# Altium PCB PCB1.PcbDoc
Units mm, origin at the board's own origin, x right, y up, seen from the top; angles counter-clockwise.
Board outline 70 x 50 mm, 2 copper layers (Top Layer, Bottom Layer); 23 components, 24 nets, 110 pads, 3 vias.
Unrouted connection lines stored in the file: 1.
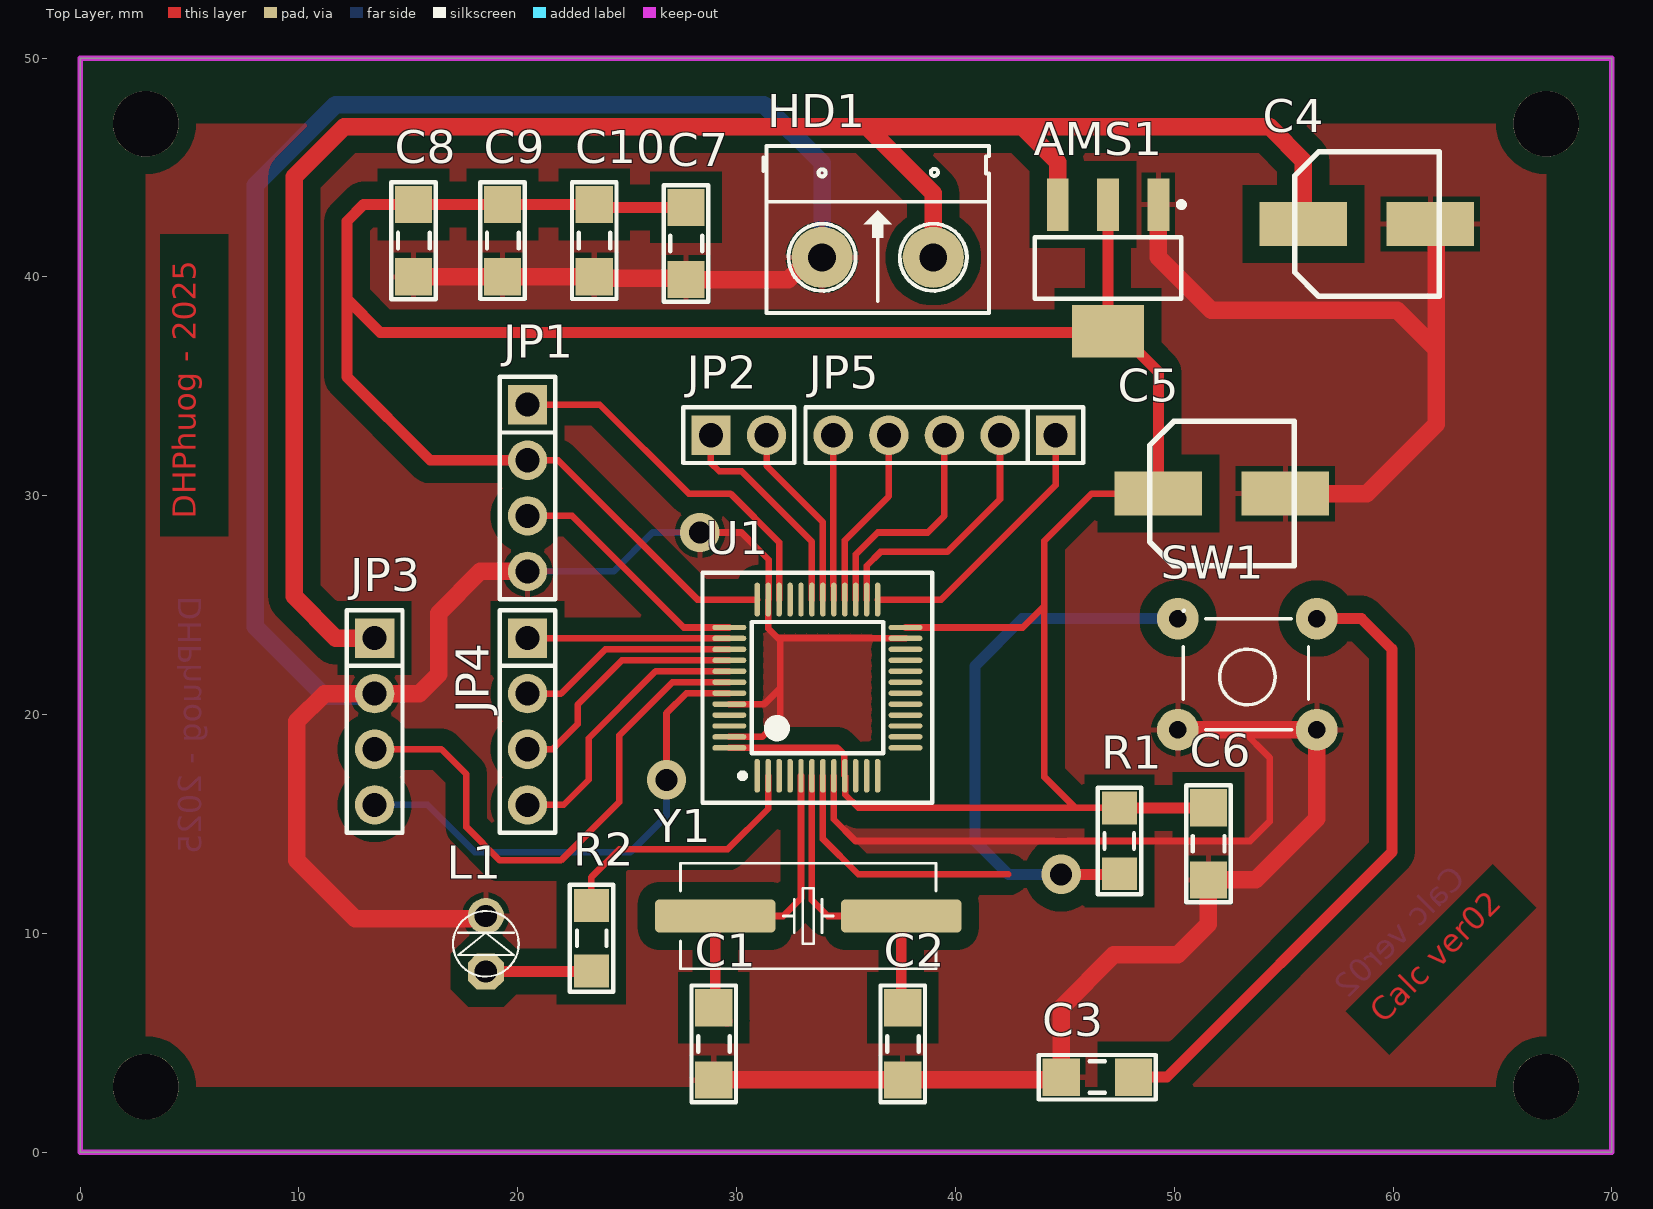
[diagram p0: Top Layer view]
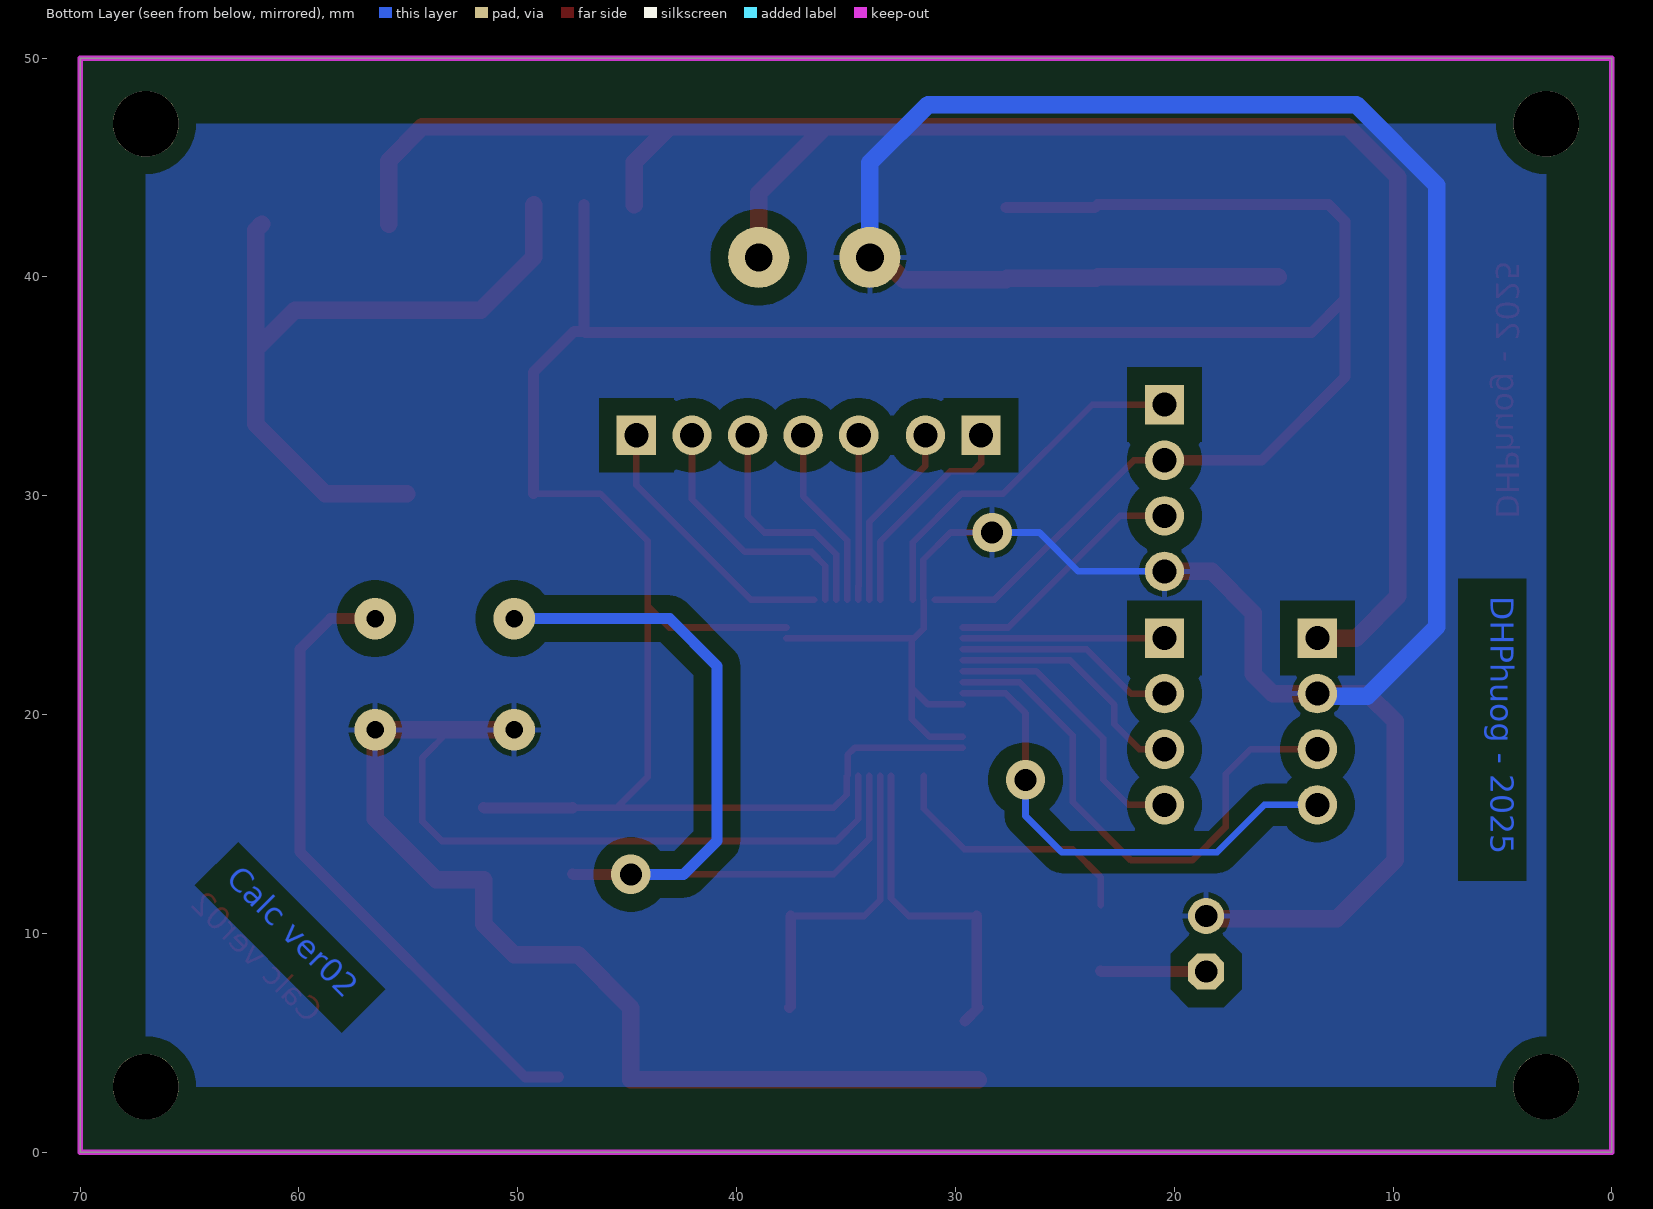
[diagram p1: Bottom Layer view, seen from below]
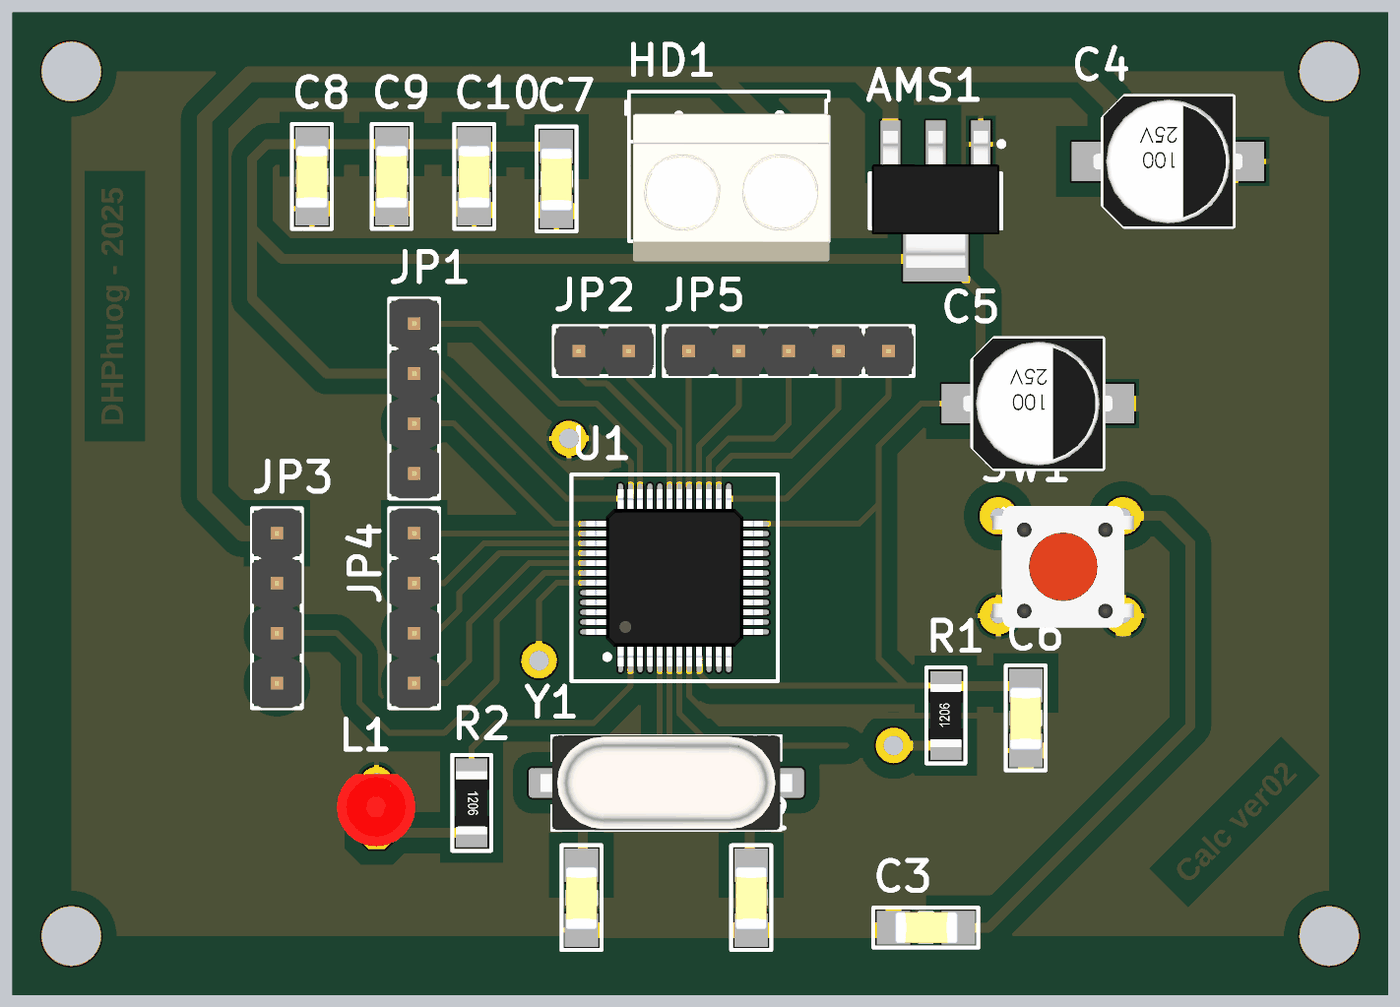
[diagram p2: 3D render of the assembled board from above, using the file's embedded part models]

## Layer stack, top to bottom
Top Solder: solder mask 0.0102, Solder Resist, Dk 3.5
Top Layer: signal copper 0.0356
Dielectric 1: dielectric 0.32, FR-4, Dk 4.8
Bottom Layer: signal copper 0.0356
Bottom Solder: solder mask 0.0102, Solder Resist, Dk 3.5

## Board outline
0,0 70,0 70,50 0,50

## Design rules (kind name [scope] priority, off if disabled: settings)
Clearance [All] p1: gap=0.8 ignorepadtopadclearanceinfootprint=FALSE
PolygonConnect [All] p1: connectstyle=Relief reliefconductorwidth=0.254 reliefentries=4 polygonreliefangle="90 Angle" airgapwidth=0.254
RoutingVias [All] p1: holewidth=0.711 width=1.27 viastyle="Through Hole" minholewidth=0.711 minwidth=1.27 maxholewidth=0.711 maxwidth=1.27
SolderMaskExpansion [All] p1: expansion=0.102 istentingtop=FALSE
Width [All] p1: maxlimit=0.8 minlimit=0.3 preferedwidth=0.5
30 further rules are at their usual default settings.

## Components (designator, comment, footprint, x,y, rotation, side; value= is the part's Value field where it differs from the comment)
AMS1 "AMS1117-3.3V" SOT223 46.976,40.407 r180 top value="AMS1117-3.3V SOT223"
C1 "22pF" "tu 1206" 28.956,4.953 r270 top
C2 "22pF" "tu 1206" 37.592,4.953 r270 top
C3 "104" "tu 1206" 46.482,3.429 r0 top
C4 "100uF" "tu nhom 6.3 (d)" 58.801,42.418 r0 top
C5 "100uF" "tu nhom 6.3 (d)" 52.176,30.099 r0 top
C6 "104" "tu 1206" 51.562,14.097 r270 top
C7 "104" "tu 1206" 27.686,41.529 r270 top
C8 "104" "tu 1206" 15.24,41.655 r270 top
C9 "104" "tu 1206" 19.304,41.656 r270 top
C10 "104" "tu 1206" 23.495,41.656 r270 top
HD1 "Header 2" HED2 33.909,40.894 r0 top
JP1 "JP 1x4 2.54" "JP 1x4 DT" 20.447,34.163 r270 top
JP2 "JP 1x2 2.54" "JP 1x2 DT" 28.829,32.766 r0 top
JP3 "JP 1x4 2.54" "JP 1x4 DT" 13.462,23.495 r270 top
JP4 "JP 1x4 2.54" "JP 1x4 DT" 20.447,23.495 r270 top
JP5 "JP 1x5 2.54" "JP 1x5 DT" 44.577,32.766 r180 top
L1 "LED 3mm" LED-3MM-RED 18.542,8.255 r90 top
R1 "10k" "tro smd 1206" 47.498,14.224 r90 top
R2 "1k" "tro smd 1206" 23.368,9.779 r270 top
SW1 "SW" SW4 56.515,19.304 r180 top value="Button chip 4 pin"
U1 "STM32F103C8T6" LQFP48 33.694,21.229 r0 top
Y1 "8MHz" "Thach Anh 2 chan SMD" 33.274,10.795 r0 top value=4Mhz

## Footprints (in the part's own frame and the unit in brackets; to place one, negate y for a bottom-side part, rotate by r counter-clockwise, add the part's x,y. Pads: shape width x height; smd on the part's side, far side on the other; paste and mask are expansions set on the pad)
HED2 [mil] "Header 2, 2 pin, hight 300mil, Pin to Pin 200, Colour Green"
  round 110 hole 50: 1(0,0) 2(200,0)
  silkscreen extent -106,-100 300,200, body extent -92,-140 302,155, height 394
"JP 1x2 DT" [mm] "2 pins, 1 row, straight, gold plating"
  rect 1.8x1.8 hole 1.1: 1(0,0)
  round 1.8 hole 1.1: 2(2.54,0)
  silkscreen extent -1.27,-1.27 3.81,1.27, body extent -1.27,-1.27 3.81,1.27, height 8.54
"JP 1x4 DT" [mm] "4 pins, 1 row, straight, gold plating"
  rect 1.8x1.8 hole 1.1: 1(0,0)
  round 1.8 hole 1.1: 2(2.54,0) 3(5.08,0) 4(7.62,0)
  silkscreen extent -1.27,-1.27 8.89,1.27, body extent -1.27,-1.27 8.89,1.27, height 8.54
"JP 1x5 DT" [mm] "5 pins, 1 row, straight, gold plating"
  rect 1.8x1.8 hole 1.1: 1(0,0)
  round 1.8 hole 1.1: 2(2.54,0) 3(5.08,0) 4(7.62,0) 5(10.16,0)
  silkscreen extent -1.27,-1.27 11.43,1.27, body extent -1.27,-1.27 11.43,1.27, height 8.54
LED-3MM-RED [mil]
  oct 65x65 hole 40: 1(0,0)
  round 65 hole 40: 2(100,0)
  silkscreen extent -9,-59 109,59, body extent -27,-77 117,80, height 181
LQFP48 [mm]
  oval 0.25x1.55 smd: 1(-2.75,-4.025) 2(-2.25,-4.025) 3(-1.75,-4.025) 4(-1.25,-4.025) 5(-0.75,-4.025) 6(-0.25,-4.025) 7(0.25,-4.025) 8(0.75,-4.025) 9(1.25,-4.025) 10(1.75,-4.025) 11(2.25,-4.025) 12(2.75,-4.025) 25(2.75,4.025) 26(2.25,4.025) 27(1.75,4.025) 28(1.25,4.025) 29(0.75,4.025) 30(0.25,4.025) 31(-0.25,4.025) 32(-0.75,4.025) 33(-1.25,4.025) 34(-1.75,4.025) 35(-2.25,4.025) 36(-2.75,4.025)
  oval 1.55x0.25 smd: 13(4.025,-2.75) 14(4.025,-2.25) 15(4.025,-1.75) 16(4.025,-1.25) 17(4.025,-0.75) 18(4.025,-0.25) 19(4.025,0.25) 20(4.025,0.75) 21(4.025,1.25) 22(4.025,1.75) 23(4.025,2.25) 24(4.025,2.75) 37(-4.025,2.75) 38(-4.025,2.25) 39(-4.025,1.75) 40(-4.025,1.25) 41(-4.025,0.75) 42(-4.025,0.25) 43(-4.025,-0.25) 44(-4.025,-0.75) 45(-4.025,-1.25) 46(-4.025,-1.75) 47(-4.025,-2.25) 48(-4.025,-2.75)
  silkscreen extent -5.25,-5.25 5.25,5.25, body extent -4.5,-4.5 4.5,4.5, height 1.5
SOT223 [mm]
  rect 1x2.4 smd: 1(-2.3,-2.9) 2(0,-2.9) 3(2.3,-2.9)
  rect 3.3x2.4 smd: 4(0,2.9)
  silkscreen extent -3.48,-3.02 3.35,1.4, body extent -3.25,-3.56 3.25,3.4, height 1.68
SW4 [mil] "SW button 4pin, 250 x250 mil"
  round 75 hole 31: 1(0,0) 2(250,-200) 3(250,0) 4(0,-200)
  silkscreen extent 15,-215 240,0, body extent -36,-220 276,24, height 276
"Thach Anh 2 chan SMD" [mm] "SMD Crystal HC49/US-SM package"
  round 0.508 on Mech15: 0(0,0)
  rrect25% 5.5x1.5 smd: 1(-4.25,0) 2(4.25,0)
  silkscreen extent -5.84,-2.41 5.84,2.41, body extent -6.4,-2.41 6.4,2.42, height 4.29
"tro smd 1206" [mm]
  rect 1.5x1.6 smd: 1(-1.5,0) 2(1.5,0)
  silkscreen extent -2.44,-0.99 2.44,0.99, body extent -1.6,-0.8 1.6,0.8, height 0.6
"tu 1206" [mm]
  rect 1.7x1.7 smd: 1(-1.65,0) 2(1.65,0)
  silkscreen extent -2.67,-1.02 2.67,1.02, body extent -1.57,-0.8 1.63,0.8, height 0.94
"tu nhom 6.3 (d)" [mm]
  rect 4x2 smd: 1(-2.9,0) 2(2.9,0)
  silkscreen extent -3.3,-3.3 3.3,3.3, body extent -3.8,-3.3 3.8,3.3, height 8

## Part data
AMS1: library part "AMS1117 SMD", "Dán", Chung_Loai=Dán, Don_Vi=Con, Ma_Hang=MH000596
C1 C2: library part "Tu 1206 22pF 50V 10%", "Dán", Chung_Loai=Dán, Don_Vi=Con, Ma_Hang=MH004547, So_Chan=2, Ten_Linh_Kien="Tụ 1206 22P 10% 50V"
C3 C6 C7 C8 C9 C10: library part "Tu 1206 104 50V 20%", "Dán", Chung_Loai=Dán, Don_Vi=Con, Ma_Hang=MH004544, So_Chan=2, Ten_Linh_Kien="Tụ 1206 104-0.1uF 20% 50V"
C4 C5: library part "Tu Nhom 100uF 16V", "Dán", Chung_Loai=Dán, Don_Vi=Con, Ma_Hang=MH002219, So_Chan=2, Ten_Linh_Kien="Tụ Nhôm 100uF 16V 6.3x5.4MM"
HD1: library part Hed2, "Header 2 (Green)"
JP1 JP3 JP4: library part "JP 1x4 2.54 Duc Thang", "Cắm", Chung_Loai=Cắm, Don_Vi=Con, Ma_Hang=MH000903, Ten_Linh_Kien="Jump Đơn Đực 2.54MM 1x40P Thẳng 11MM"
JP2: library part "JP 1x2 2.54 Duc Thang", "Cắm", Chung_Loai=Cắm, Don_Vi=Con, Ma_Hang=MH000903, Ten_Linh_Kien="Jump Đơn Đực 2.54MM 1x40P Thẳng 11MM"
JP5: library part "JP 1x5 2.54 Duc Thang", "Cắm", Chung_Loai=Cắm, Don_Vi=Con, Ma_Hang=MH000903, Ten_Linh_Kien="Jump Đơn Đực 2.54MM 1x40P Thẳng 11MM"
L1: library part "LED 3mm Do", "Cắm", Chung_Loai=Cắm, Don_Vi=Con, Ma_Hang=MH003892, Ten_Linh_Kien="Led 3MM Phủ Đỏ (10c)"
R1: library part "Tro 1206 1% 10k", "Dán", Chung_Loai=Dán, Don_Vi=Con, Ma_Hang=MH005885, So_Chan=2, Ten_Linh_Kien="Trở 1206 1% 10k"
R2: library part "Tro 1206 1% 1k", "Dán", Chung_Loai=Dán, Don_Vi=Con, Ma_Hang=MH005880, So_Chan=2, Ten_Linh_Kien="Trở 1206 1% 1k"
SW1: library part SW4, "Switch button 4 pin"
U1: "STM32 ARM-based 32-bit MCU with ARM 32-bit Cortex-M3 Microcontroller, 128 Kbytes Flash, 48-pin LQFP, Industrial Temperature", ComponentLink1Description="Manufacturer Link", ComponentLink1URL=www.st.com/stm32, ComponentLink2Description=Datasheet, ComponentLink2URL=http://www.st.com/stonline/products/literature/ds/13586.pdf, DatasheetVersion="rev6, Mar-2008", PackageDescription="48-Pin Low-Profile Quad Flat Pack, 7 x 7 mm Body, 0.5 mm Pitch (LQFP48)", PackageReference=LQFP48, PackageVersion=Mar-2008, Published=30-May-2008, Publisher="Altium Limited"
Y1: library part "Thach Anh 2 chan SMD", "Crystal For all Crystal 2pin."

## Free pads (board coordinates)
  round 3 hole 3: 2(3,3) 2(3,47) 2(67,3) 2(67,47)

## Via types
v1: diameter 1.8, hole 1, Top Layer to Bottom Layer, 3 vias

## Nets (pads, with @x,y where several pads share a name; then routed paths per layer and width w, separated by ;. In a path a pad name is that pad's centre, name@x,y a point inside that pad or via, vN(x,y) a via of type N, cw(c..) or ccw(c..) an arc to the next point about the centre after c; other vN are vias at no path point)
+3.3V: AMS1.2 AMS1.4 C5.1 C6.1 C7.1 C8.1 C9.1 C10.1 JP1.2 R1.2 U1.9 U1.24 U1.36 U1.48 | length 145.5
  Top Layer w0.3: JP1.2 21.844,31.623 28.213,25.254 U1.36 ; U1.48 34.607,18.479 34.925,18.161 34.925,17.223 U1.9 34.969,17.179 34.969,16.339 35.56,15.748 45.466,15.748 ; U1.24 43.077,23.979 44.069,24.971 ; R1.2@47.498,15.748 45.466,15.748 ; C5.1 46.228,30.099 44.069,27.94 44.069,24.971 ; 44.069,24.971 44.069,17.145 45.466,15.748
  Top Layer w0.5: JP1.2 16.002,31.623 12.192,35.433 12.192,38.989 ; C7.1 23.622,43.179 C10.1 C9.1 15.241,43.306 C8.1 12.952,43.305 12.192,42.545 12.192,38.989 ; AMS1.2 AMS1.4 ; R1.2@47.498,15.748 R1.2 51.539,15.724 C6.1 ; C5.1 49.276,35.657 47.426,37.507 AMS1.4 ; 12.192,38.989 13.716,37.465 46.934,37.465 AMS1.4
+5V: AMS1.3 C4.1 HD1.2 JP3.1 | length 85.7
  Top Layer w0.8: JP3.1 11.684,23.495 9.779,25.4 9.779,44.577 12.065,46.863 35.941,46.863 ; HD1.2 38.989,43.815 35.941,46.863 ; AMS1.3 44.676,45.24 43.053,46.863 ; C4.1 55.901,45.318 54.356,46.863 43.053,46.863 ; 35.941,46.863 43.053,46.863
COL1: JP5.1 U1.25 | length 12.6
  Top Layer w0.3: U1.25 39.351,25.254 44.577,30.48 JP5.1
COL2: JP5.2 U1.26 | length 11.8
  Top Layer w0.3: U1.26 35.944,26.8 36.576,27.432 39.624,27.432 42.037,29.845 JP5.2
COL3: JP5.3 U1.27 | length 10.5
  Top Layer w0.3: U1.27 35.444,27.316 36.449,28.321 38.735,28.321 39.497,29.083 JP5.3
COL4: JP5.4 U1.28 | length 8.3
  Top Layer w0.3: U1.28 34.944,27.959 36.957,29.972 JP5.4
COL5: JP5.5 U1.29 | length 7.5
  Top Layer w0.3: JP5.5 34.417,25.881 34.444,25.854 U1.29
GND: AMS1.1 C1.2 C2.2 C3.1 C4.2 C5.2 C6.2 C7.2 C8.2 C9.2 C10.2 HD1.1 JP1.4 JP3.2 L1.2 SW1.1 SW1.3 U1.8 U1.23 U1.35 U1.44 U1.47 | length 248.9
  Top Layer w0.3: v1(28.321,28.321) 30.226,28.321 31.469,27.078 31.469,25.279 U1.35 31.444,23.928 31.877,23.495 ; U1.47 31.171,18.979 32.004,19.812 32.004,21.209 ; U1.44 31.274,20.479 32.004,21.209 ; U1.8 34.444,15.213 35.433,14.224 53.467,14.224 54.356,15.113 54.356,18.034 53.086,19.304 ; U1.23 37.703,23.495 31.877,23.495 ; 31.877,23.495 32.004,23.368 32.004,21.209
  Top Layer w0.8: C8.2 C9.2 ; L1.2 18.415,10.668 12.573,10.668 9.906,13.335 9.906,19.685 11.176,20.955 JP3.2 15.494,20.955 16.383,21.844 16.383,24.638 18.288,26.543 JP1.4 ; C9.2 C10.2 23.558,39.943 27.622,39.943 C7.2 32.354,39.879 33.369,40.894 HD1.1 ; C1.2 C2.2 44.831,3.303 44.831,6.604 47.244,9.017 50.165,9.017 51.562,10.414 C6.2 53.722,12.447 56.515,15.24 SW1.1 53.086,19.304 SW1.3 ; AMS1.1 49.276,40.894 51.689,38.481 60.198,38.481 61.976,36.703 ; C5.2 58.801,30.099 61.976,33.274 61.976,36.703 ; C4.2 61.976,42.143 61.976,36.703
  Bottom Layer w0.3: JP1.4 24.384,26.543 26.162,28.321 v1(28.321,28.321)
  Bottom Layer w0.8: JP3.2 13.335,20.828 11.176,20.828 8.001,24.003 8.001,44.196 11.684,47.879 31.242,47.879 33.909,45.212 HD1.1
LCD_SCL: JP3.3 U1.42 | length 24.9
  Top Layer w0.3: JP3.3 16.51,18.415 17.653,17.272 17.653,14.859 19.177,13.335 21.971,13.335 24.638,16.002 24.638,19.05 27.067,21.479 U1.42
LCD_SDA: JP3.4 U1.43 | length 22.9
  Top Layer w0.3: v1(26.797,17.018) 26.797,20.066 27.71,20.979 U1.43
  Bottom Layer w0.3: JP3.4 15.875,15.875 18.034,13.716 25.146,13.716 26.797,15.367 v1(26.797,17.018)
LED_TEST: R2.1 U1.2 | length 12.2
  Top Layer w0.3: R2.1 23.368,12.573 24.638,13.843 29.591,13.843 31.444,15.696 U1.2
NetC3_2: C3.2 SW1.4 | length 29.4
  Top Layer w0.5: C3.2 49.657,3.429 59.944,13.716 59.944,22.987 58.547,24.384 SW1.4
NetL1_1: L1.1 R2.2 | length 4.8
  Top Layer w0.5: L1.1 23.344,8.255 R2.2
NRST: R1.1 SW1.2 U1.7 | length 37.4
  Top Layer w0.3: U1.7 33.944,14.316 35.56,12.7 42.418,12.7
  Top Layer w0.5: v1(44.831,12.7) 47.474,12.7 R1.1
  Bottom Layer w0.5: v1(44.831,12.7) 42.418,12.7 40.894,14.224 40.894,22.225 43.053,24.384 SW1.2
ROW1: JP4.1 U1.38 | length 9.2
  Top Layer w0.3: JP4.1 20.463,23.479 U1.38
ROW2: JP4.2 U1.39 | length 10.1
  Top Layer w0.3: JP4.2 21.971,20.955 23.995,22.979 U1.39
ROW3: JP4.3 U1.40 | length 11.6
  Top Layer w0.3: JP4.3@20.586,18.554 JP4.3 21.59,18.415 22.733,19.558 22.733,20.447 24.765,22.479 U1.40
ROW4: JP4.4 U1.41 | length 13.2
  Top Layer w0.3: JP4.4@20.65,16.078 JP4.4 22.098,15.875 23.241,17.018 23.241,18.923 26.297,21.979 U1.41
RX: JP2.1 U1.31 | length 10
  Top Layer w0.3: JP2.1 28.829,31.496 29.21,31.115 30.226,31.115 33.444,27.897 U1.31
SWCLK: JP1.3 U1.37 | length 11.3
  Top Layer w0.3: JP1.3 22.479,29.083 27.583,23.979 U1.37
SWDIO: JP1.1 U1.34 | length 16.7
  Top Layer w0.3: JP1.1 23.749,34.163 27.813,30.099 29.718,30.099 31.944,27.873 U1.34
TX: JP2.2 U1.30 | length 8.6
  Top Layer w0.3: JP2.2 31.369,31.369 33.944,28.794 U1.30
X0: C1.1 U1.5 Y1.1 | length 14.9
  Top Layer w0.3: Y1.1 32.131,10.795 32.944,11.608 U1.5
  Top Layer w0.5: Y1.1 29.024,6.671 C1.1 C1.1@29.556,6.003
X1: C2.1 U1.6 Y1.2 | length 14.3
  Top Layer w0.3: U1.6 33.444,11.514 34.163,10.795 Y1.2
  Top Layer w0.5: Y1.2 37.524,6.671 C2.1
pads on no net: U1.1 U1.3 U1.4 U1.10 U1.11 U1.12 U1.13 U1.14 U1.15 U1.16 U1.17 U1.18 U1.19 U1.20 U1.21 U1.22 U1.32 U1.33 U1.45 U1.46 Y1.0

## Polygon pours and split planes (outlines as drawn)
GND on Bottom Layer "GND_L02_P000" (solid, remove dead copper, pour order 0): 3,47 67,47 67,3 3,3
GND on Top Layer "GND_L01_P002" (solid, remove dead copper, pour order 2): 3,47 67,47 67,3 3,3

## Keep-outs
Keep-Out Layer:
  the board outline again, w0.254

## Other copper
Top Layer:
  text "DHPhuog - 2025" at 5.629,28.956 h1.8 r90
  text "Calc ver02" at 59.802,5.603 h1.8 r45
Bottom Layer:
  text "DHPhuog - 2025" at 5.883,25.4 h1.8 r90
  text "Calc ver02" at 63.612,12.207 h1.8 r45